# EAGLE board Schematic (EAGLE 8.2.0)
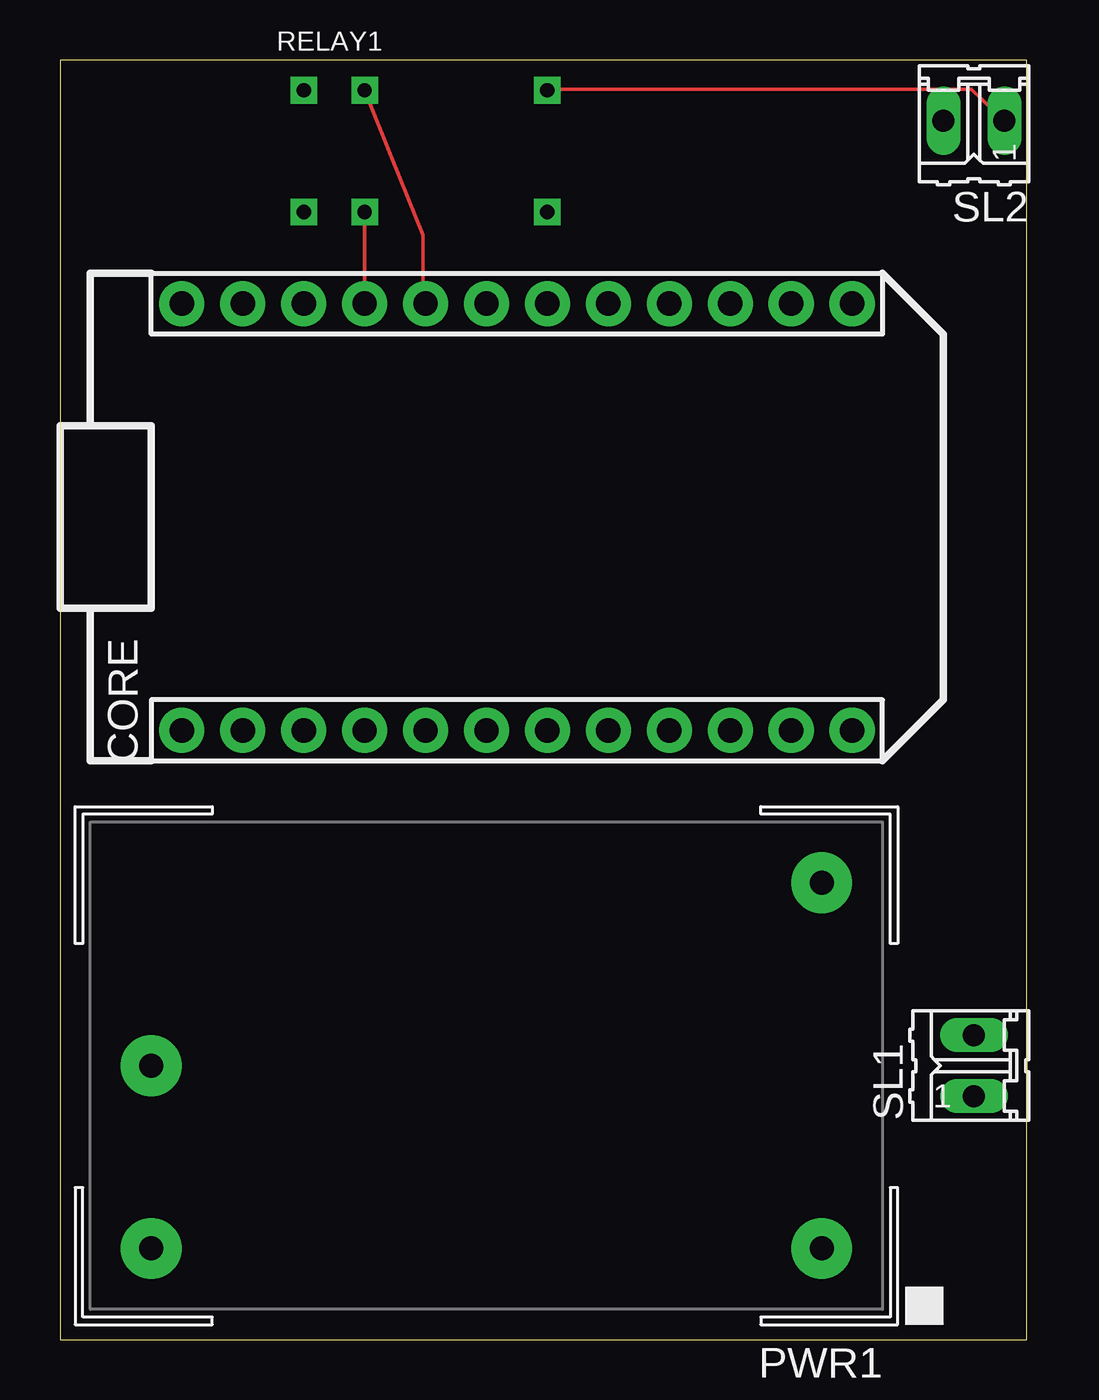
[diagram p0: board, top side]
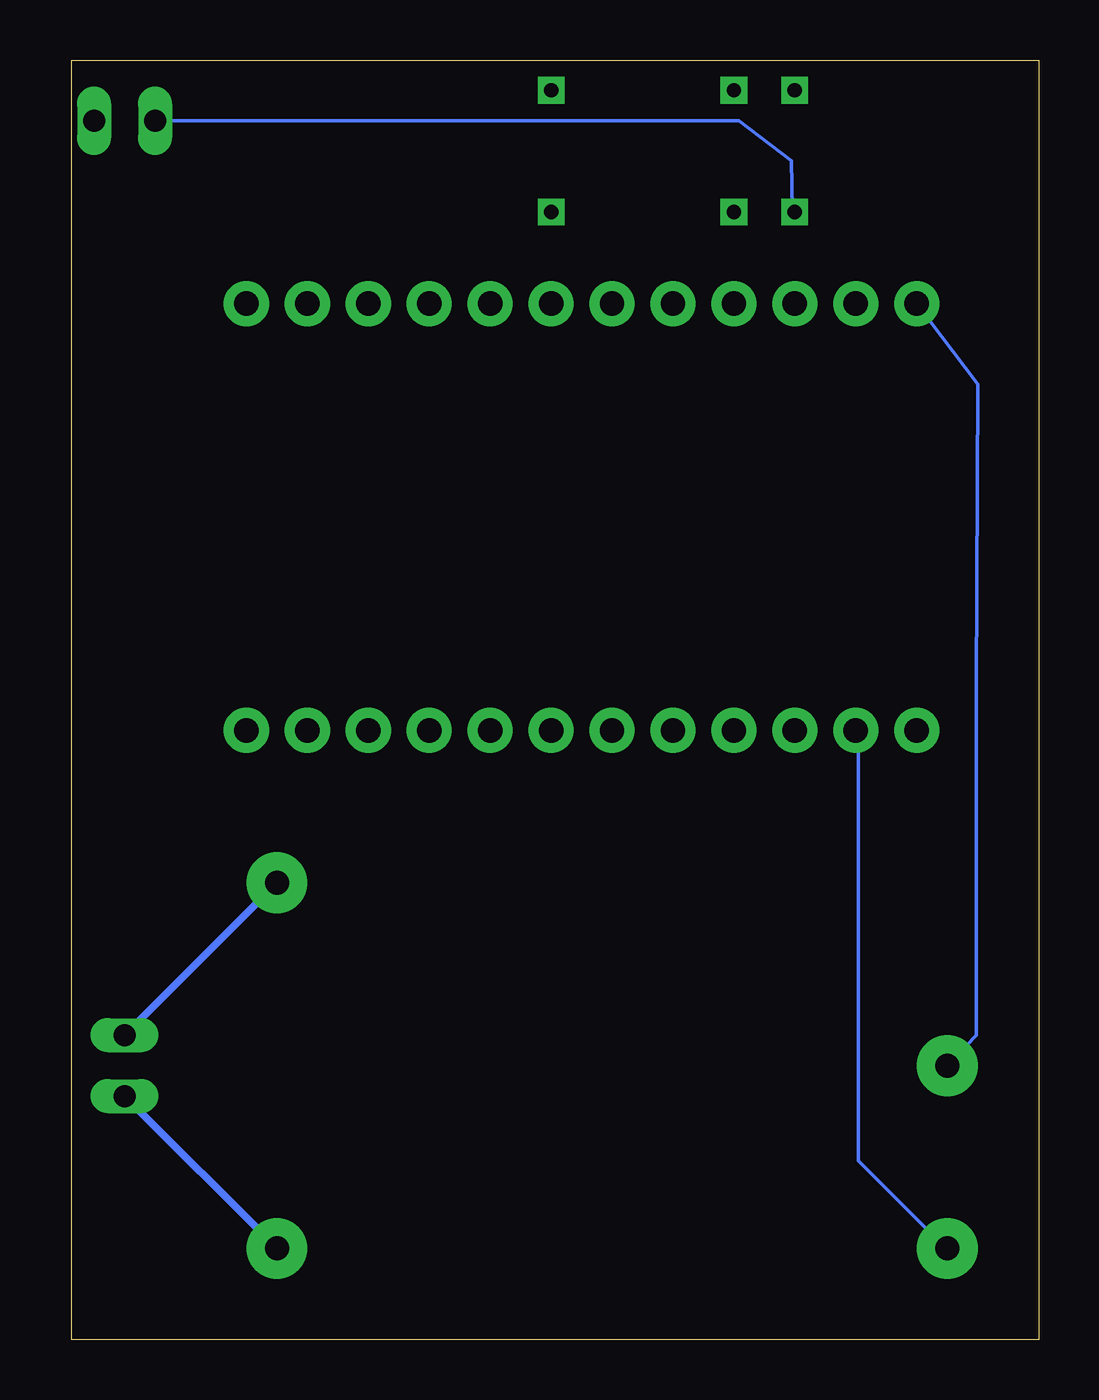
[diagram p1: board, bottom side, seen from below]

Size 40.31 x 53.33 mm. Coordinates in mm from the lower left corner, seen from the top.
Outline: 0,0 40.31,0 40.31,53.33 0,53.33 0,0
Copper layers (1*16): Top 0.035mm / dielectric 1.5mm / Bottom 0.035mm
Design rules "default": minimum track width 6mil, minimum drill 0.35mm, track to track 6mil, track to pad 6mil, pad to pad 6mil, via to via 6mil, smd to smd 6mil, copper to edge 40mil, drill to drill 6mil, minimum pad ring 10mil, minimum via ring 8mil, stop-mask expansion 4mil, vias tented up to drill 0mil, thermal gap 10mil

## Footprints (pad centres in the part's own frame; a part is rotated, then mirrored left to right if it is on the bottom)
SPARK_CORE = drill 1.016 pad 1.88: 1 -8.89,13.97; 2 -8.89,11.43; 3 -8.89,8.89; 4 -8.89,6.35; 5 -8.89,3.81; 6 -8.89,1.27; 7 -8.89,-1.27; 8 -8.89,-3.81; 9 -8.89,-6.35; 10 -8.89,-8.89; 11 -8.89,-11.43; 12 -8.89,-13.97; 13 8.89,-13.97; 14 8.89,-11.43; 15 8.89,-8.89; 16 8.89,-6.35; 17 8.89,-3.81; 18 8.89,-1.27; 19 8.89,1.27; 20 8.89,3.81; 21 8.89,6.35; 22 8.89,8.89; 23 8.89,11.43; 24 8.89,13.97
LOW_PROFILE_POWER_MODULE = drill 1 pad 2.54: P1 -12.7,7.62; P2 -12.7,-7.62; P3 15.24,7.62; P4 15.24,0
AZ9571 = drill 0.6 square: 1 -5.08,-2.54; 2 -2.54,2.54; 5 5.08,-2.54; 6 5.08,2.54; 9 -2.54,-2.54; _ -5.08,2.54
02P = drill 0.914 long: 1 -1.27,0; 2 1.27,0

## Placement (x,y rotation side)
CORE  SPARK_CORECORE  [SPARK_CORE]  19.05,34.29 90 top
PWR1  RAC02-3.3SC  [LOW_PROFILE_POWER_MODULE]  19.05,11.43 180 top
RELAY1  AZ9571AZ9571  [AZ9571]  15.24,49.53 0 top
SL1  [02P]  38.1,11.43 90 top
SL2  [02P]  38.1,50.8 180 top

## Library data of the parts
CORE = Particle
PWR1 = recom-powerline-acdc-converters; INPUT_RANGE: 80 - 277 (VAC); MAX_CAPACITIVE_LOAD: 2000uF; OUTPUT_CURRENT: 600mA; OUTPUT_VOLTAGE: 3.3v
RELAY1 = Zettler
SL1 SL2 = con-amp-quick; OC_FARNELL: unknown; OC_NEWARK: unknown

## Nets
3V3: CORE.24 PWR1.P4
3V3*: CORE.22
GND: CORE.2 PWR1.P3
GND2: CORE.21 RELAY1.9
L: PWR1.P2 SL1.2
LOAD+: RELAY1.6 SL2.1
LOAD-: RELAY1.1 SL2.2
N: PWR1.P1 SL1.1
SWITCH: CORE.20 RELAY1.2
VIN: CORE.1

## Tracks (layer width: path | path; a pad name or v marks a point on that pad's centre or on a via)
3V3
  Bottom 0.152: CORE.24 2.54,39.83 2.59,27.18 2.59,12.7 PWR1.P4
GND
  Bottom 0.152: CORE.2 7.52,25.3 7.52,7.47 3.86,3.81 PWR1.P3
GND2
  Top 0.152: CORE.21 RELAY1.9
L
  Bottom 0.305: PWR1.P2 SL1.2
LOAD+
  Top 0.152: RELAY1.6 20.32,52.12 38,52.12 SL2.1
LOAD-
  Bottom 0.152: SL2.2 12.5,50.8 10.31,49.12 10.26,47.09 RELAY1.1
N
  Bottom 0.305: PWR1.P1 SL1.1
SWITCH
  Top 0.152: RELAY1.2 13.84,49.23 15.14,46.02 15.14,43.28 CORE.20